# Altium PCB PCB robot V3.2.PCBDOC (part 2 of 3)
Units mil, origin at the board's own origin, x right, y up, seen from the top; angles counter-clockwise.
Board outline 11800 x 7870 mil, 2 copper layers (Top Layer, Bottom Layer); 128 components, 117 nets, 529 pads, 283 vias.
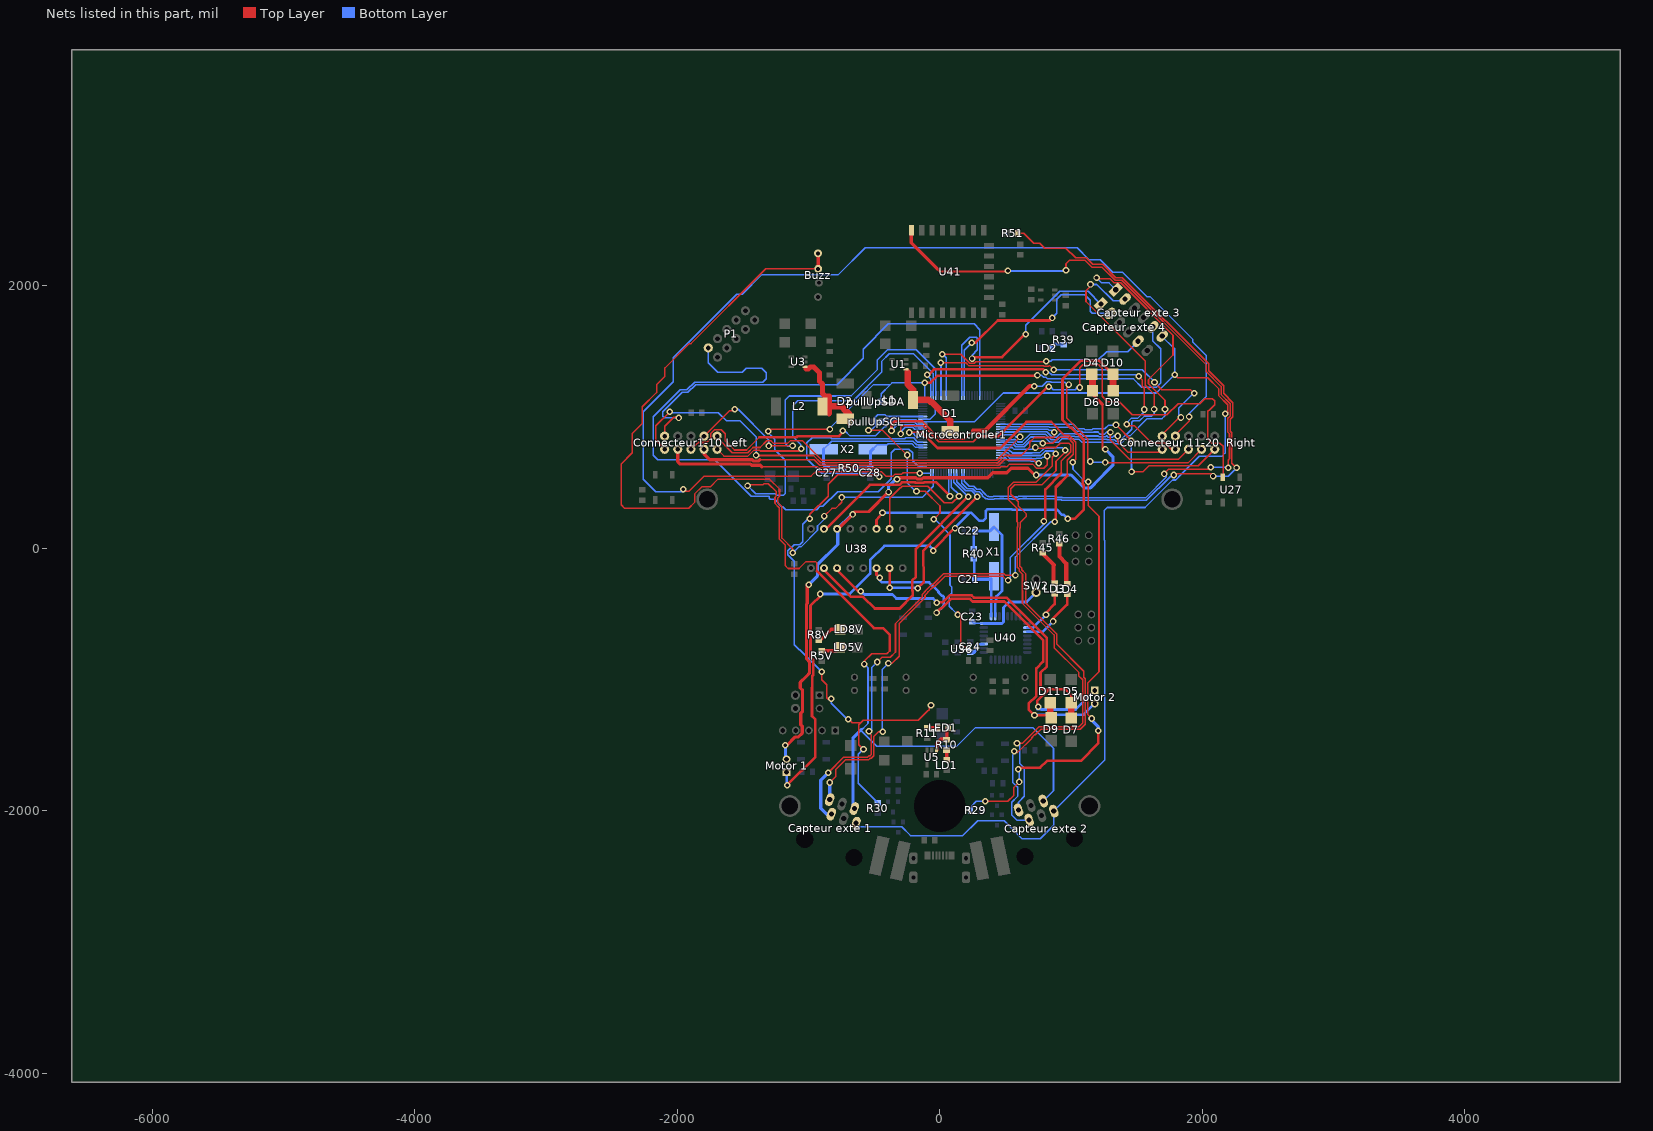
[diagram p2: the nets of this part, all layers, seen from the top]

## Via types
v1: diameter 50, hole 28, Top Layer to Bottom Layer, 283 vias

## Nets (pads, with @x,y where several pads share a name; then routed paths per layer and width w, separated by ;. In a path a pad name is that pad's centre, name@x,y a point inside that pad or via, vN(x,y) a via of type N, cw(c..) or ccw(c..) an arc to the next point about the centre after c; other vN are vias at no path point) (continued)
"MOTOR1 IN 1": MicroController1.18 U38.2 | length 1330.2
  Top Layer w20: U38.2@-881.89,148.62 -868.07,148.62 -532.56,484.13 -343.57,484.13 -342.92,483.48 -307.67,483.48 -288.75,502.4 -187.57,502.4 -183.58,498.41 -122.33,498.41 -118.33,502.4 -26.22,502.4 v1(78.54,397.64)
  Bottom Layer w10: MicroController1.18@69.1,569.75 69.1,407.08 v1(78.54,397.64)
"MOTOR1 IN 2": MicroController1.17 U38.7 | length 1070.6
  Top Layer w10: U38.7@-381.89,148.62 -381.89,380.57 -301.54,460.93 -298.32,460.93 -287.2,472.05 -89.7,472.05 35.07,347.27 96.88,347.27 v1(147.24,397.64)
  Bottom Layer w10: MicroController1.17@88.79,569.75 88.79,465.54 147.24,407.09 v1(147.24,397.64) v1@147.24,394.88
"MOTOR1 OUT+": "Motor 1.2" D4.1 D6.2 U38.3 | length 5289.2
  Top Layer w15: v1@1239.92,754.21 1239.92,1097.11
  Top Layer w20: v1@-650.69,279.82 -540.32,279.82
  Top Layer w23.82: v1@-1161.28,-1498.86 -1099.57,-1437.15 -1076.4,-1437.15 -1047.7,-1408.44 -1047.7,-1355.1 -1058.66,-1344.13 -1058.66,-1256.14 -1045.02,-1242.5 -1045.02,-1081.95 -1060.45,-1066.51 ; -1062.4,-1064.56 -1062.4,-1021.91 -1013.31,-972.82 -993.64,-953.15 -993.64,-863.49 -1013.82,-843.31 -1013.82,-423.68 -1009.55,-419.41 -1009.55,-277.97 v1(-998.33,-277.97) ; U38.3@-781.89,148.62 -771.85,148.62 v1(-662.22,258.25) ; -540.32,279.82 v1@-394.9,425.24 ; v1(-325.3,526.04) -313.21,538.13 -181.63,538.13 -171.37,527.87 -134.53,527.87 -124.28,538.13 367.2,538.13 404.61,575.53 510.58,575.53 545.11,610.06 673.5,610.06 v1@726.57,556.99 ; D6.2@1164.57,1201.57 1164.57,1172.46 1239.92,1097.11
  Top Layer w50: D4.1@1160.24,1325.98 1164.57,1321.65 D6.2@1164.57,1201.57
  Bottom Layer w23.82: v1(-1175.81,-1499.82) -1175.81,-1598.21 -1167.32,-1606.69 ; v1(-998.33,-277.97) -932.48,-212.13 -932.48,-126.2 -776.87,29.41 U38.3@-776.87,143.6 ; U38.3@-781.89,148.62 -672.26,258.25 v1(-662.22,258.25) ; v1(-389.67,428.64) -389.67,473.25 v1@-339.45,523.46 ; v1(734.72,558.6) 1001.99,558.6 1099.76,460.83 1150.61,460.83 1177.74,487.95 1177.74,489.94 1319.74,631.95 1319.74,698.74 v1@1269.21,749.27
  other v1: 1263.29,754.67
"MOTOR1 OUT-": "Motor 1.1" D8.2 D10.1 U38.6 | length 6669.7
  Top Layer w20: v1(-1162.24,-1805.18) -949.61,-1592.54 -949.61,-1302.55 -973.21,-1278.95 -973.21,-1062.23 -971.63,-1060.66 -971.63,-972.82 -964.17,-965.36 -964.17,-851.28 -984.35,-831.11 -984.35,-435.89 v1@-902.44,-353.98 ; U38.6@-481.89,148.62 -481.89,215.51 v1(-435.96,271.54) ; v1@-49.02,-8.25 v1@110.55,151.32 ; v1(976.3,225.1) 1028.88,225.1 1098.68,294.9 1098.68,480.82 1090.79,488.71 1090.79,523.97 1098.68,531.86 1098.68,707.59 1098.58,707.69 1098.58,753.75 1098.68,753.85 1098.68,824.18 1004.95,917.91 996.2,917.91 936.02,978.09 936.02,1288.86 1077.48,1430.31 1215.75,1430.31 D10.1@1320.67,1325.39
  Top Layer w50: D10.1@1320.67,1325.39 1320.67,1202.95 D8.2@1322.05,1201.57
  Bottom Layer w20: -1167.32,-1706.69 -1164.19,-1709.82 v1@-1164.19,-1789.67 ; v1(-909.23,-348.17) -685.51,-348.17 -529.37,-192.03 -529.37,-88.68 -421.73,18.96 -76.22,18.96 v1@-49.02,-8.25 ; v1(-435.96,271.54) 230.77,271.54 ; v1@110.55,151.32 230.77,271.54 ; v1(976.3,225.1) 946.5,254.9 933.94,254.9 894.7,294.13 552.32,294.13 548.44,298.01 364.31,298.01 352.4,286.1 352.4,231.06 332.34,211 300.94,211 240.41,271.54 230.77,271.54
  other v1: -49.92,-18.21 116.91,152.22
"MOTOR2 IN1": MicroController1.16 U38.10 | length 2006
  Top Layer w20: U38.10@-881.89,-151.38 -881.89,-165.94 -677.64,-370.2 -583.43,-370.2 -494.83,-458.8 -304.41,-458.8 -205.59,-359.98 -205.59,-325.03 -209.88,-320.74 -209.88,-245.19 -181.87,-217.18 -181.87,-4.7 v1(216.54,393.7)
  Bottom Layer w10: MicroController1.16@108.47,569.75 108.47,501.76 v1(216.54,393.7)
"MOTOR2 IN2": MicroController1.15 U38.15 | length 1522.5
  Top Layer w20: U38.15@-381.89,-151.38 U38.15@-381.89,-151.57 ; v1(-381.3,-299.67) -381.3,-235.63 -381.89,-236.22 U38.15@-381.89,-151.57 ; U38.15@-379.92,-149.61 U38.15@-381.89,-151.57 ; v1(-167.32,-303.11) -122.88,-258.62 -124.02,-17.72 v1(287.4,393.7)
  Bottom Layer w10: MicroController1.15@128.16,569.75 128.16,506.96 198.12,437.01 244.09,437.01 v1(287.4,393.7)
  Bottom Layer w20: v1(-381.3,-299.67) -170.77,-299.67 v1(-167.32,-303.11)
"MOTOR2 OUT+": "Motor 2.1" D5.1 D7.2 U38.11 | length 3323.8
  Top Layer w20: U38.11@-781.89,-151.38 -781.89,-165.12 -619.37,-327.64 v1(-601.06,-327.64) ; v1@-6.89,-409.82 23.35,-409.82 75.4,-357.78 242.57,-357.78 260.58,-375.79 507.97,-375.79 815.94,-683.76 815.94,-899.07 768.29,-946.73 768.29,-1057.38 785.71,-1074.8 959.21,-1074.8 1001.57,-1117.17 D5.1@1001.57,-1177.36 ; v1@743.27,-1207.24 743.27,-1163.23 831.69,-1074.8
  Top Layer w50: D7.2@1001.57,-1290.35 D5.1@1001.57,-1177.36
  Bottom Layer w20: -581.42,-344.06 -573.39,-352.09 -361.24,-352.09 -331.05,-382.28 -50.1,-382.28 v1@-18.95,-413.43 ; v1@744.13,-1226.22 770,-1226.22 771.71,-1227.93 1036.44,-1227.93 1181.14,-1083.23
  other v1: 751.02,-1207.24 -21.24,-415.73
"MOTOR2 OUT-": "Motor 2.2" D9.2 D11.1 U38.14 | length 3150
  Top Layer w20: U38.14@-481.89,-151.38 -481.89,-200.75 v1(-457.66,-224.98) ; v1(-24.04,-490.67) 10.85,-455.79 16.36,-455.79 86.81,-385.33 231.15,-385.33 250.6,-404.78 493.78,-404.78 788.39,-699.39 788.39,-863.84 737.22,-915 737.22,-1124.62 678.27,-1183.57 678.27,-1228.52 v1(722.56,-1272.81) 832.85,-1272.81 D9.2@844.09,-1284.06 ; D11.1@831.48,-1189.98 D11.1@844.09,-1177.36
  Top Layer w50: D9.2@844.09,-1284.06 D11.1@844.09,-1177.36
  Bottom Layer w20: v1@-464.72,-234.17 -441.71,-257.19 -363.7,-257.19 -362.09,-258.8 -79.65,-258.8 -8.92,-329.53 -8.92,-336.59 15.97,-361.48 23.03,-361.48 30.03,-368.48 30.03,-438.48 28.15,-438.48 v1(-24.04,-490.67) ; v1@724.29,-1267.78 1096.59,-1267.78 1181.14,-1183.23
NetBuzz_0: Buzz.0 MicroController1.24 pad.0 | length 6147.1
  Top Layer w12: -2334.78,883.07 -2342.42,875.43 -2342.42,728.43 -2427.54,643.31 -2427.54,331.34 -2402.09,305.89 -1911.95,305.89 -1867.89,349.94 -1867.89,413.88 -1811.52,470.25 -1747.58,470.25 -1692.85,524.98 -1294.63,524.98 -1220.94,451.3 -1220.94,396.87 -1235.51,382.31 -1235.51,350.37 -1202.65,317.51 -1202.65,78.39 -1119.21,-5.05 v1(-1119.21,-34.53) ; -2334.78,883.09 -2267.05,950.83 -2267.05,1078.17 -2157.48,1187.74 -2157.48,1247.48 -2094.25,1310.71 -2094.25,1374.43 -1908.33,1560.35 -1894.96,1560.35 -1325.28,2130.04 pad.0@-925.79,2130.04 ; v1(-880.18,245.79) -821.59,304.37 -794.46,304.37 -747.09,351.75 v1(-747.09,387.91)
  Top Layer w25: pad.0@-925.79,2130.04 Buzz.0@-925.79,2245.96
  Bottom Layer w12: v1(-1119.21,-34.53) -1074.03,10.65 -1057.84,10.65 -931.5,137 -931.5,171.03 -863.14,239.38 -869.55,245.79 v1(-880.18,245.79) ; v1(-747.09,387.91) -133.5,387.91 -49.01,472.41 MicroController1.24@-49.01,569.75
NetC21_1: C21.1 R40.1 U40.1 X1.1 | length 569.1
  Bottom Layer w19.68: R40.1@259.66,-80.85 264.54,-85.72 C21.1@264.54,-235.55 ; U40.1@392.04,-517.51 X1.1@392.04,-233.51
  Bottom Layer w25: C21.1@264.54,-235.55 390,-235.55 X1.1@392.04,-233.51
NetC22_1: C22.1 R40.2 U40.2 X1.2 | length 1023
  Bottom Layer w19.68: R40.2@259.66,-0.85 259.66,127.45 C22.1@264.54,132.33
  Bottom Layer w20: X1.2@413.75,162.22 474.74,101.23 474.74,-323.55 431.55,-366.74 431.55,-392.31 423.54,-400.32 U40.2@423.54,-517.51
  Bottom Layer w25: C22.1@264.54,132.33 383.86,132.33 X1.2@413.75,162.22
NetC23_2: C23.2 SW2.1 U40.4 U40.32 | length 654.5
  Bottom Layer w12: C23.2@247.24,-559.93 259.94,-572.62 U40.32@336.92,-572.62
  Bottom Layer w20: U40.32@336.92,-572.62 473.83,-572.62 486.53,-559.93 U40.4@486.53,-517.51 486.53,-451.66 529.53,-408.66 662.4,-408.66 SW2.1@735.04,-336.02
NetC24_2: C24.2 U40.27 | length 146.5
  Bottom Layer w20: 276,-749.97 295.87,-730.1 U40.27@336.92,-730.1
  Bottom Layer w25: C24.2@232.87,-791.84 262.88,-791.84 276,-778.73 276,-749.97
NetC27_1: C27.1 MicroController1.34 R50.2 X2.2 | length 1075.3
  Bottom Layer w12: X2.2@-884.76,754.25 -823.07,815.94 ; -400.26,815.94 -319.42,815.94 -319.36,815.89 -202.72,815.89 -175.39,788.56 -130.01,788.56 MicroController1.34@-129.71,788.26
  Bottom Layer w12.01: -823.07,815.94 -400.26,815.94
  Bottom Layer w25: X2.2@-884.76,754.25 -884.76,637.12 C27.1@-862,614.35 -857,609.35 R50.2@-730.21,609.35
NetC28_1: C28.1 MicroController1.33 R50.1 X2.1 | length 681.6
  Bottom Layer w12: X2.1@-510.75,754.25 -476.2,788.8 -399.85,788.8 -392.18,796.46 -327.48,796.46 -327.43,796.41 -211.17,796.41 -183.84,769.08 -167.48,769.08 -167.27,768.87 -137.88,768.87 -137.78,768.78 -129.92,768.78 MicroController1.33@-129.71,768.57
  Bottom Layer w25: R50.1@-650.21,609.35 -532.69,609.35 C28.1@-527.69,614.35 -527.69,737.31 X2.1@-510.75,754.25
"NetCapteur exte 1_1": "Capteur exte 1.1" MicroController1.93 | length 4531.7
  Top Layer w12: v1(-838.17,-1784.69) -793.52,-1740.04 -793.52,-1686.63 -719.59,-1612.7 -542.06,-1612.7 -529.11,-1599.75 -521.95,-1599.75 -502.56,-1580.35 -502.56,-1433.52 -466.48,-1397.44 v1(-433.43,-1397.44) ; v1(-390.55,-876.59) -363.01,-876.59 -309.07,-822.66 -309.07,-573.4 -112.23,-376.55 -112.23,-357.87 -89.65,-335.29 -89.65,-332.68 -49.74,-292.78 -40.99,-292.78 37.77,-214.02 482.42,-214.02 v1@519.41,-251 ; v1(729.57,768.29) 735.68,762.17 800.38,762.17 806.5,768.29 885,768.29 918.33,801.61 985.08,801.61 998.7,787.99 998.7,736.24 971.98,709.51 969.94,709.51 925.83,665.39 925.83,571.24 ; v1(794.43,206.69) v1@804.59,216.85
  Top Layer w19.68: v1@804.59,216.85 804.59,450 925.83,571.24
  Bottom Layer w12: v1@-437.05,-1397.44 -437.05,-923.09 v1(-390.55,-876.59) ; MicroController1.93@464.77,768.57 552.14,768.57 566.93,753.78 715.06,753.78 v1(729.57,768.29) v1@729.57,786.55 ; v1@536.24,-238.88 536.24,-72.22 799.96,191.5 v1@799.96,199.88
  Bottom Layer w25: v1(-838.17,-1784.69) -838.17,-1915.06 -821.6,-1915.06
  other v1: 521.14,-244.51
"NetCapteur exte 1_2": "Capteur exte 1.2" MicroController1.92 | length 4832.4
  Top Layer w10: v1(784.41,800.73) 863.37,800.73 907.87,845.24 974.84,845.24 1019.04,801.04 1019.04,780.08 1018.8,779.84 1018.8,738.39 1019.04,738.15 1019.04,717.19 973.86,672.01 973.86,555.24
  Top Layer w12: v1(-849.25,-1709.41) -732.98,-1593.14 -550.16,-1593.14 -537.21,-1580.19 -530.05,-1580.19 -522.71,-1572.84 -522.71,-1419.38 v1@-537.42,-1404.67 ; v1(-474.88,-866.14) -439.21,-830.47 -377.28,-830.47 -336.99,-790.18 -336.99,-573.65 -131.79,-368.45 -131.79,-349.77 -109.2,-327.18 -109.2,-324.58 -57.85,-273.22 -49.1,-273.22 29.66,-194.46 490.52,-194.46 501.22,-205.16 v1(577.18,-205.16)
  Top Layer w19.68: v1@884.33,202.5 884.33,465.71
  Top Layer w21.65: 884.33,465.71 973.86,555.24
  Bottom Layer w10: MicroController1.92@464.77,788.26 564.17,788.26 580.17,772.26 643.49,772.26 687.74,816.51 772.13,816.51 v1@790.69,797.95
  Bottom Layer w12: v1(-538.62,-1395.04) v1@-536.2,-1397.46 ; v1@-528.54,-1400.59 -516.93,-1388.98 -516.93,-908.19 v1(-474.88,-866.14) ; v1@577.11,-206.91 577.11,-66.2 845.81,202.5 v1@886.79,202.5
  Bottom Layer w25: v1(-849.25,-1709.41) -906.69,-1766.85 -906.69,-1980.67 -861.36,-2026 -825.76,-2026
  other v1: 876.2,203.76
"NetCapteur exte 1_5": "Capteur exte 1.5" "Capteur exte 2.5" "Capteur exte 3.5" MicroController1.44 pullUpSDA.2 | length 10679.5
  Top Layer w12: v1@-1464.31,484.9 -1346.24,484.9 -1338.06,493.09 -1306.11,493.09 -1244.07,431.05 -1244.07,401.4 -1255.07,390.41 -1255.07,342.27 -1222.21,309.41 -1222.21,70.29 -1175.81,23.89 -1175.81,-133.17 -1155.28,-153.7 -1071.73,-153.7 -1019.21,-101.18 -946.2,-101.18 -935.53,-111.85 -935.53,-173.52 ; v1@-1311.18,895.53 -1298.56,908.15 v1(-836.54,908.15) ; v1(-574.09,-882.07) -574.09,-859.25 -517.95,-803.11 -403.13,-803.11 -379.61,-779.59 ; v1@726.06,1315.08 v1@739.63,1328.64
  Top Layer w19.68: -935.53,-173.52 -500.65,-608.41 -430.89,-608.41 -379.61,-659.68 -379.61,-779.59 ; v1(-112.89,1262.97) -69.94,1262.97 -17.64,1315.28 612.9,1315.28 613.09,1315.08 v1@726.06,1315.08
  Bottom Layer w12: v1(-1464.33,477.95) -1402.43,416.05 -1306.15,416.05 -1305.92,416.28 -1255.07,416.28 -1243.62,404.82 -1189.57,404.82 -1176.95,417.44 -1176.95,670.98 -1257.6,751.63 -1257.6,831.52 -1324.21,898.13 -1324.21,899.45 -1317.3,892.54 v1(-1307.05,892.54) ; v1@-836.54,916.54 -507.64,1245.43 -378.58,1245.43 ; -609.55,-1397.44 -546.48,-1334.37 -546.48,-909.68 v1(-574.09,-882.07) ; -598.13,-1380.77 -598.13,-1390.59 -480.45,-1508.27 119.16,-1508.27 124.69,-1513.8 269.82,-1368.67 712.58,-1368.67 867.09,-1523.17 867.09,-1847.37 788.78,-1925.68 ; pullUpSDA.2@-446.24,1118.27 -446.24,1177.78 -378.58,1245.43 ; MicroController1.44@-129.71,985.11 -72.23,985.11 -34.27,1023.07 -34.27,1069.61 -112.89,1148.23 v1(-112.89,1262.97) -115.35,1260.51 -363.5,1260.51 -378.58,1245.43 ; v1(744.78,1319.61) 776.8,1319.61 792.25,1304.16 810.53,1304.16 823.44,1291.24 1477.09,1291.24 1540.35,1227.98 1653.1,1227.98 1684.41,1259.28 1684.41,1520.57 1624,1580.98 1624,1685.8
  Bottom Layer w25: -650.23,-1983.47 -660.12,-1973.58 -660.12,-1442.76 -598.13,-1380.77
"NetCapteur exte 1_6": "Capteur exte 1.6" "Capteur exte 2.6" "Capteur exte 3.6" MicroController1.43 pullUpSCL.2 | length 8986.2
  Top Layer w12: v1(1790.94,1324.07) 1814.84,1300.18 2042.22,1300.18 2125.23,1217.16 2125.23,1164.85 2195.53,1094.55 v1@2195.53,1026.69
  Bottom Layer w12: -637.82,-2094.4 -609.82,-2122.4 -289.76,-2122.4 -222.92,-2189.25 175.73,-2189.25 289.44,-2075.54 290.14,-2076.24 491.16,-2076.24 627.83,-2212.91 766.28,-2212.91 869.59,-2109.6 869.59,-2002.68 1258.87,-1613.4 1258.87,59.1 1255.43,62.55 1255.43,289.21 1277.18,310.96 1565.33,310.96 1774.94,520.57 1799.4,520.57 1821.94,543.12 1821.94,546.33 1977.24,701.63 2150.87,701.63 2175.22,725.98 v1(2175.22,1024.61) ; pullUpSCL.2@-445.26,965.59 -429.74,981.1 -182.65,981.1 -167.18,965.63 -129.92,965.63 MicroController1.43@-129.71,965.42 265.9,965.42 483.99,1183.52 1650.39,1183.52 v1(1790.94,1324.07) 1790.94,1524.53 1785.28,1524.53 1694.71,1615.09
"NetCapteur exte 2_1": "Capteur exte 2.1" MicroController1.95 | length 4079.8
  Top Layer w12: v1(589.17,-1485.89) 631.73,-1485.89 681.21,-1436.41 681.21,-1436.1 758.66,-1358.66 1063.04,-1358.66 1090.43,-1331.26 1090.43,-1002.14 1058.64,-970.34 1058.64,-943.33 872.06,-756.76 872.06,-660.52 631.24,-419.69 631.24,-198.42 605.47,-172.66 605.47,-158.16 591.51,-144.19 591.51,162.49 593.93,164.91 593.93,196.86 588.95,201.84 588.95,305.52 521.32,373.15 521.32,462.56 563.6,504.84 735.5,504.84 858.72,628.06 858.72,694.5 v1(885.28,721.06)
  Bottom Layer w12: MicroController1.95@464.77,729.2 498.28,729.2 498.48,729 517.97,729 539.79,707.17 730.2,707.17 730.36,707.33 769.58,707.33 804.22,741.96 870.83,741.96 ; v1@598.74,-1488.7 611.02,-1500.98 611.02,-1640.11 645.39,-1674.47 645.39,-1890.08 600.84,-1934.64 600.84,-1994.09
"NetCapteur exte 2_2": "Capteur exte 2.2" MicroController1.94 | length 4446.4
  Top Layer w12: v1@587.2,-1556.81 592.66,-1556.81 700.77,-1448.7 700.77,-1444.21 723.36,-1421.62 727.85,-1421.62 771.25,-1378.22 1071.7,-1378.22 1109.99,-1339.93 1109.99,-994.04 1097.7,-981.74 1097.7,-935.96 891.62,-729.89 891.62,-652.42 654.48,-415.28 654.48,-192.18 625.03,-162.73 625.03,-150.05 611.07,-136.09 611.07,154.39 613.49,156.81 613.49,196.56 661.22,244.29 661.22,260.91 598.68,323.45 598.68,354.98 540.88,412.78 540.88,454.46 571.7,485.28 780.33,485.28 886.52,591.48 886.52,663.33 v1@964.25,741.06
  Bottom Layer w10: MicroController1.94@464.77,748.89 530.29,748.89 552.52,726.65
  Bottom Layer w12: 551.87,726.65 552.52,726.65 703.44,726.65 ; 555.77,-1710.98 555.77,-1783.77 591.07,-1819.07 593.41,-1819.07 593.41,-1891.04 549.02,-1935.43 549.02,-2033.12 586.98,-2071.09 681.65,-2071.09 ; 556.54,-1718.17 556.54,-1572.88 ; 703.44,726.81 761.52,726.81 796.15,761.44 866.16,761.44 870.03,765.31 938.76,765.31 v1(956,748.07)
  other v1: 567.26,-1545.96
"NetCapteur exte 3_1": "Capteur exte 3.1" MicroController1.91 | length 3092.2
  Top Layer w12: v1@1206.22,2055.94 1296.07,2055.94 1328.9,2023.12 1379.33,2023.12 1777.85,1624.6 1777.85,1472.68 1591.1,1285.93 1591.1,1254.76 1716.95,1128.92 v1(1716.95,1060.3)
  Bottom Layer w12: MicroController1.91@464.77,807.94 570.62,807.94 587.82,790.74 635.84,790.74 693.74,848.64 800.66,848.64 841.35,807.95 905.5,807.95 932.54,834.99 1019.43,834.99 1022.06,832.36 1060.11,832.36 1084.87,807.6 1323.51,807.6 1333.01,798.1 1381.02,798.1 1439.81,856.89 1450,856.89 1582.03,988.92 1695.16,988.92 1716.95,1010.71 v1(1716.95,1060.3) ; v1(1195.59,2061.22) 1234.19,2022.62 1290.39,2022.62 1342.08,1970.93
"NetCapteur exte 3_2": "Capteur exte 3.2" MicroController1.90 | length 2910.3
  Top Layer w12: v1@1168.21,2015.89 1114.78,1962.46 1114.78,1880.77 1567.2,1428.35 1567.2,1242.2 1633.6,1175.81 v1(1633.6,1060.59)
  Bottom Layer w12: MicroController1.90@464.77,827.63 562.76,827.63 564.35,829.22 576.89,829.22 595.89,810.22 627.77,810.22 685.67,868.12 808.73,868.12 849.42,827.43 897.43,827.43 924.47,854.47 1027.5,854.47 1030.13,851.84 1068.18,851.84 1089.82,830.2 1272.31,830.2 1273.15,831.04 1277.11,827.08 1331.58,827.08 1341.08,817.58 1372.95,817.58 1463.62,908.25 1463.62,960.88 1474.31,971.57 1523.39,971.57 1560.43,1008.62 1616,1008.62 1633.6,1026.22 v1(1633.6,1060.59) ; v1(1149.35,2010.94) 1197.83,2010.94 1322.64,1886.14 1398.71,1886.14 1412.79,1900.22
"NetCapteur exte 4_1": "Capteur exte 4.1" MicroController1.63 | length 1987.8
  Top Layer w10: v1(246.46,1446.32) v1@256.79,1456.65
  Top Layer w19.68: v1@256.79,1456.65 475.75,1456.65 v1@658.72,1639.63
  Bottom Layer w10: MicroController1.63@167.53,1164.24 167.53,1548.53 229.41,1610.41 279.58,1610.41 287.73,1602.26 287.73,1512.04 246.46,1470.77 v1(246.46,1446.32) ; v1(656.28,1631.08) 656.28,1699.37 916.08,1959.17 1130.98,1959.17 1228.79,1861.36
"NetCapteur exte 4_2": "Capteur exte 4.2" MicroController1.64 | length 1804.7
  Top Layer w10: v1(245.28,1567.22) 273.33,1567.22 ; 838.05,1736.42 v1(857.28,1755.65)
  Top Layer w19.68: 273.33,1567.22 442.52,1736.42 838.05,1736.42
  Bottom Layer w10: MicroController1.64@187.21,1164.24 187.21,1509.16 v1(245.28,1567.22) ; v1(857.28,1755.65) 892.29,1790.65 892.29,1899.37 926.75,1933.84 1104.25,1933.84 1146.91,1891.18 1146.91,1808.19 1164.45,1790.65 1299.5,1790.65
"NetCapteur exte 4_5": "Capteur exte 4.5" MicroController1.57 | length 1938.6
  Top Layer w10: v1(19.21,1479.47) 160.14,1479.47 230.88,1408.72 262.03,1408.72 273.55,1420.24 v1@830.02,1420.24
  Bottom Layer w10: v1@19.92,1482.28 49.42,1452.79 MicroController1.57@49.42,1164.24 ; v1(811.73,1425.14) 844.92,1425.14 855.96,1436.18 1209.11,1436.18 1271.3,1498.37 1431.48,1498.37 1511.64,1578.52
"NetConnecteur1-10 Left_1": "Connecteur1-10 Left.1" MicroController1.52 | length 2562.5
  Top Layer w12: -1696.06,755.12 -1643.74,702.8 -1461.42,702.8 -1415.64,748.58 -1375.87,748.58 -1369.12,741.83 -1070.17,741.83 v1(-1053.96,758.05)
  Bottom Layer w12: v1(-1053.96,758.05) -1057.72,761.81 -1057.72,789.33 -1120.26,851.87 -1120.26,1085.39 -1080.83,1124.82 -658.84,1124.82 -442.7,1340.96 -442.7,1424.61 -384.23,1483.07 -199.86,1483.07 -49.01,1332.21 MicroController1.52@-49.01,1164.24
"NetConnecteur1-10 Left_2": "Connecteur1-10 Left.2" MicroController1.88 | length 2714.2
  Top Layer w12: -1701.79,855.12 -1696.06,855.12 -1696.06,844.69 -1580.3,728.92 -1462.96,728.92 -1423.74,768.14 -1369.25,768.14 -1318.39,818.99 -1286.45,818.99 -1269.79,802.33 -1156.43,802.33 -1137.43,821.33 -1105.49,821.33 -1103.23,819.08 -1045.22,819.08 -897.6,671.46 434.59,671.46 v1(611.83,848.7)
  Bottom Layer w12: MicroController1.88@464.77,867 562.47,867 580.77,848.7 v1(611.83,848.7)
"NetConnecteur1-10 Left_3": "Connecteur1-10 Left.3" MicroController1.97 | length 3020.1
  Top Layer w12: -1371.51,674.45 -955.91,674.45 -913.8,632.34 450.79,632.34 492.9,674.45 545.22,674.45 ; 501.89,674.23 715.71,674.23 740.57,649.37 v1(754.37,649.37)
  Top Layer w25: -1796.06,755.12 -1796.06,717.46 -1753.05,674.45 -1427.82,674.45 -1418.33,664.96 -1381,664.96 -1371.51,674.45
  Bottom Layer w12: MicroController1.97@464.77,689.83 502.03,689.83 525.43,666.44 694,666.44 697.92,662.51 744.4,662.51 v1@763.39,643.52
"NetConnecteur1-10 Left_4": "Connecteur1-10 Left.4" MicroController1.53 | length 2900.7
  Top Layer w12: -1796.06,855.12 -1602.5,1048.68 -1574.04,1048.68 v1(-1562.66,1060.06) ; v1@-1302.42,782.78 v1(-1121.46,782.78)
  Bottom Layer w12: v1(-1562.66,1060.06) -1536.1,1060.06 -1302.42,826.38 v1(-1302.42,780.43) ; v1@-1131.56,778.11 -1157.19,778.11 -1175.83,796.75 -1175.83,1132.26 -1147.19,1160.9 -675.65,1160.9 -474.39,1362.16 -474.39,1437.61 -397.91,1514.09 -179.17,1514.09 -29.32,1364.24 MicroController1.53@-29.32,1164.24
"NetConnecteur1-10 Left_5": "Connecteur1-10 Left.5" MicroController1.42 | length 2080.5
  Top Layer w12: -1896.06,755.12 -1890.67,755.12 -1839.23,806.56 -1775.95,806.56 -1744.62,837.89 -1744.62,875.23 -1716.18,903.68 -1664.8,903.68 -1634.51,873.39 -1634.51,819.7 -1563.98,749.17 -1471.91,749.17 -1373.39,847.7 ; v1@-739.9,882.17 v1(-739.9,895.93)
  Top Layer w19.68: -1373.39,847.7 -1090.58,847.7 -1082.71,855.57 -766.5,855.57 v1@-739.9,882.17
  Bottom Layer w12: v1(-739.9,895.93) -723.82,895.93 -684.45,856.56 -490.33,856.56 -419.78,927.11 -411.78,927.11 -377.26,961.62 -190.72,961.62 -174.84,945.74 MicroController1.42@-129.71,945.74
"NetConnecteur1-10 Left_7": "Connecteur1-10 Left.7" MicroController1.96 | length 3406.5
  Top Layer w12: -1355.57,620.45 -929.58,620.45 -921.9,612.78 458.89,612.78 466.56,620.45 510.3,620.45 531.73,641.89 707.32,641.89 738.4,610.81 793.27,610.81 820.16,637.7 v1(820.16,703.48)
  Top Layer w25: -1996.06,755.12 -1996.06,661 -1976.95,641.89 -1441.3,641.89 -1431.82,632.4 -1367.52,632.4 -1355.57,620.45
  Bottom Layer w12: MicroController1.96@466.31,709.52 509.9,709.52 531.72,687.69 700.29,687.69 705.99,681.99 732.57,681.99 738.43,687.85 770.31,687.85 770.47,687.69 777.5,687.69 785.12,695.32 811.99,695.32 v1(820.16,703.48)
"NetConnecteur1-10 Left_9": "Connecteur1-10 Left.9" MicroController1.86 | length 4078.5
  Top Layer w12: -2096.06,755.12 -2164.23,823.29 -2164.23,933.41 v1(-2056.18,1041.46) ; v1@-1392.4,707.3 -961.11,707.3 -905.7,651.9 442.69,651.9 498.09,707.3 620.73,707.3 685.85,772.42 685.85,807.68 722.86,844.69 865.51,844.69 873.43,852.6 v1(873.43,885.39)
  Bottom Layer w12: v1@-2058.92,1034.19 -1686.75,1034.19 -1623.33,970.77 -1519.81,970.77 -1399.67,850.63 v1(-1399.67,710.02) ; MicroController1.86@464.77,906.37 587.53,906.37 587.82,906.66 669.11,906.66 669.53,907.08 824.87,907.08 833.42,898.53 860.29,898.53 v1(873.43,885.39)
"NetConnecteur1-10 Left_10": "Connecteur1-10 Left.10" MicroController1.70 | length 3641
  Top Layer w10: -2096.06,855.12 -2096.06,929.04 -2026.54,998.56 v1@-1996.18,998.56
  Bottom Layer w10: -2111.32,870.37 -2096.06,855.12 ; v1(-1989.21,993.64) -2096.65,993.64 -2111.32,1008.31 -2111.32,1039.49 -1961.68,1189.13 -1919.05,1189.13 -1860.23,1247.95 -781.73,1247.95 -582.07,1447.62 -582.07,1518.94 -390.26,1710.75 261.73,1710.75 305.32,1667.16 MicroController1.70@305.32,1164.24
"NetConnecteur 11-20  Right_1": "Connecteur 11-20  Right.1" MicroController1.84 | length 1983.7
  Top Layer w12: v1@1356.36,928.58 v1@1456.91,828.03 ; v1(1462.05,583.21) 1549.98,583.21 1595.61,628.84 1969.78,628.84 2096.06,755.12
  Bottom Layer w12: MicroController1.84@464.77,945.74 653.09,945.74 653.4,946.04 841,946.04 841.31,945.74 1021.56,945.74 1021.56,943.06 1054.34,910.28 1100.7,910.28 1105.96,905.02 1163.44,905.02 1169.54,911.12 1257.87,911.12 1285.69,938.94 v1@1332.09,938.94 ; v1(1459.51,818.41) 1459.51,645.53 1462.05,642.99 v1(1462.05,583.21)
  other v1: 1343.5,940.43
"NetConnecteur 11-20  Right_3": "Connecteur 11-20  Right.3" MicroController1.41 | length 3451.5
  Top Layer w12: -133.24,968.03 2.31,832.48 190.49,832.48 254.02,896 ; v1(984.41,1248.11) 967.28,1230.98 967.28,1158.05 966.77,1157.54 966.77,995.02 1128.44,833.35 1128.44,680.75 v1(1147.54,661.65) ; v1@1276.18,651.1 1892.05,651.1 1996.06,755.12
  Top Layer w19.68: v1(-367.28,896.52) -367.28,944.35 -343.61,968.03 -133.24,968.03
  Top Layer w31.5: 254.02,896 346.14,896 685.94,1235.81 v1(721.81,1235.81)
  Bottom Layer w12: v1(-367.28,896.52) -322.72,941.08 -197.73,941.08 -182.91,926.26 -129.92,926.26 MicroController1.41@-129.71,926.05 ; v1(721.81,1235.81) 782.02,1235.81 815.69,1269.48 847.57,1269.48 850.4,1266.65 952.87,1266.65 v1@970.91,1248.62 ; v1(1147.54,661.65) 1154.74,654.45 v1(1260.61,654.45)
"NetConnecteur 11-20  Right_5": "Connecteur 11-20  Right.5" MicroController1.85 | length 1606.5
  Top Layer w12: v1(1301.12,885.04) 1301.12,824.63 1446.08,679.67 1820.61,679.67 1896.06,755.12
  Bottom Layer w12: MicroController1.85@464.77,926.05 464.86,926.14 661.04,926.14 661.46,926.56 832.94,926.56 835.62,923.87 1013.2,923.87 1046.27,890.8 1084.32,890.8 1089.57,885.54 1171.51,885.54 1172.6,886.63 1206.82,886.63 1223.98,869.47 1256.49,869.47 1273.65,886.63 v1@1292.8,886.63
"NetConnecteur 11-20  Right_7": "Connecteur 11-20  Right.7" MicroController1.51 | length 2744.7
  Top Layer w12: 787.42,1363.41 v1(808.19,1342.64) ; v1@1419.04,932.64 1485.83,932.64 1614.75,803.72 1716.19,803.72 1764.79,755.12 1796.06,755.12 ; v1(1517.48,1310.3) 1542.52,1285.26 1542.52,1235.33 1548.78,1229.07 ; 1542.78,1235.94 1558.33,1220.39 v1(1558.33,1058.21)
  Top Layer w19.68: v1@-78.47,1328.65 -43.72,1363.41 787.42,1363.41
  Bottom Layer w12: v1@-108.76,1310.31 -85.67,1310.31 -68.69,1293.34 MicroController1.51@-68.69,1164.24 ; v1(808.19,1342.64) 833.09,1342.64 853.28,1322.44 v1@1518.62,1322.44 ; v1(1425.14,944.94) 1415,944.94 1462.54,992.48 1510.91,992.48 1558.33,1039.9 v1(1558.33,1058.21)
  other v1: -94.41,1322.54
"NetConnecteur 11-20  Right_8": "Connecteur 11-20  Right.8" MicroController1.25 | length 8786.7
  Top Layer w12: v1@-1938.78,435.45 -1910.16,435.45 -1795.1,550.51 -979.9,550.51 -948.29,582.12 -916.35,582.12 -913.52,584.96 -444.78,584.96 -410.33,550.51 -355.36,550.51 -341.27,564.6 -309.32,564.6 -308.32,563.6 -290.32,563.6 -278.52,575.39 -156,575.39 v1(-152.95,572.34) ; 1796.06,855.12 1796.06,863.9 1900.69,968.52 v1(1900.69,1001.85)
  Bottom Layer w12: v1@-1951.06,431.75 -2164.09,431.75 -2258.64,526.3 -2258.64,1041.5 -2031.56,1268.58 -2031.56,1452.11 -1547.45,1936.22 -1504.77,1936.22 -1354.84,2086.14 -771.67,2086.14 -566.93,2290.89 1047.93,2290.89 1138.7,2200.12 1224.17,2200.12 1319.39,2104.9 1392.46,2104.9 1581.2,1916.16 1606.28,1916.16 1930.17,1592.26 1930.17,1570.44 2030.87,1469.74 2030.87,1157.83 v1@1889.96,1016.93 ; v1(-152.95,572.34) MicroController1.25@-71.28,572.34
  other v1: -1953.48,450.16
"NetConnecteur 11-20  Right_9": "Connecteur 11-20  Right.9" MicroController1.87 | length 1377.9
  Top Layer w12: v1@1349.61,848.67 v1(1357.01,856.06) 1357.01,809.76 1433.56,733.21 1674.15,733.21 1696.06,755.12
  Bottom Layer w12: MicroController1.87@464.77,886.68 595.39,886.68 595.89,887.18 677.18,887.18 677.6,887.6 816.8,887.6 857.49,846.91 889.36,846.91 916.4,873.95 1035.57,873.95 1038.2,871.32 1076.25,871.32 1091.51,856.06 1209.84,856.06 1216.23,849.68 1264.24,849.68 1270.63,856.06 1275.68,856.06 1285.18,846.56 1317.06,846.56 1326.57,856.06 v1(1357.01,856.06)
"NetConnecteur 11-20  Right_10": "Connecteur 11-20  Right.10" MicroController1.55 | length 2759.1
  Top Layer w12: v1(8.19,1415.12) 198.18,1415.12 223.18,1390.12 792.22,1390.12 795.76,1386.58 827.7,1386.58 831.25,1390.12 840.19,1390.12 v1(869.27,1361.04) ; v1(1637.17,1266.46) 1637.17,1262.91 1691.46,1208.62 1912.11,1208.62 v1(1939.55,1181.18) v1@1933.78,1181.18 ; 1696.06,855.12 1696.06,868.23 1823.03,995.2 1823.03,1009.25 1835.26,997.03 v1(1838.48,997.03)
  Bottom Layer w12: v1@7.34,1408.27 10.05,1405.56 MicroController1.55@10.05,1164.24 ; v1(869.27,1361.04) 1543.96,1361.04 v1@1640.13,1264.87 ; v1(1838.48,997.03) 1835.26,997.03 1823.03,1009.25 1823.03,1070.43 1933.78,1181.18 v1(1939.55,1181.18)
NetD1_2: D1.2 L1.2 U1.1 | length 656.2
  Top Layer w50: -243.64,1342.89 -243.64,1249.19 -202.85,1208.41 L1.2@-202.85,1130.98 -85.67,1130.98 -72.01,1117.32 -62.91,1117.32 79,975.41 D1.2@79,894.27
NetD2_2: D2.2 L2.2 U3.1 | length 729.1
  Top Layer w39.37: -1016.87,1368.68 -999.35,1368.68 -985.49,1382.54 -959.47,1382.54 -915.3,1338.37 -915.3,1273.01 -893.64,1251.36 -893.64,1180.57 -873.31,1160.24 -841.67,1160.24 -841.67,1081.87 -841.67,1027.62 -844.59,1024.7
  Top Layer w50: -841.67,1081.87 -749.21,1081.87 -730.69,1063.35 -730.69,1062.37 -688.13,1019.81 D2.2@-688.13,960.02
NetLD1_K: LD1.K R10.1 | length 70.9
  Top Layer w25: LD1.K@54.13,-1611.75 R10.1@54.13,-1540.88
NetLD2_K: LD2.K R39.1 | length 86.9
  Bottom Layer w25: LD2.K@856.73,1537.52 876.41,1557.21 R39.1@935.47,1557.21
NetLD3_A: LD3.A R45.1 | length 235.7
  Top Layer w31.5: R45.1@786.57,-43.27 870.12,-126.81 ; 868.6,-245.93 868.6,-128.33
NetLD3_K: LD3.K U40.10 | length 385.6
  Top Layer w20: v1(810.3,-506.48) 810.3,-491.44 876.2,-425.53 LD3.K@876.2,-346.37
  Bottom Layer w10: v1@810.3,-521.54 v1(810.3,-506.48)
  Bottom Layer w20: U40.10@667.63,-604.12 712.65,-604.12 v1(810.3,-506.48)
NetLD4_A: LD4.A R46.1 | length 328.1
  Top Layer w12: LD4.A@964.09,-263.67 LD4.A@970.83,-270.4
  Top Layer w31.5: R46.1@912.22,33.39 912.22,-63.31 964.09,-115.18 LD4.A@964.09,-263.67
NetLD4_K: LD4.K U40.11 | length 479.9
  Top Layer w20: v1(863.92,-557.28) 863.92,-535.65 970.83,-428.74 LD4.K@970.83,-350.4
  Bottom Layer w20: U40.11@667.63,-635.62 785.58,-635.62 v1(863.92,-557.28)
NetLD5V_A: LD5V.A R5V.1 | length 147.8
  Top Layer w25: R5V.1@-900.35,-779.74 -789.07,-779.74 LD5V.A@-763.27,-753.94
NetLD8V_A: LD8V.A R8V.1 | length 197.5
  Top Layer w25: R8V.1@-921.54,-700.43 -911.73,-700.43 -827.11,-615.81 LD8V.A@-759.07,-615.81
NetLED1_A: LED1.A R10.2 U5.1 | length 234.8
  Top Layer w25: U5.1@-23.2,-1537.91 -23.2,-1484.22 6.51,-1454.51 56.07,-1454.51 56.34,-1454.24 LED1.A@56.34,-1365.08
NetLED1_K: LED1.K R11.1 | length 77.5
  Top Layer w25: R11.1@-94.26,-1368.13 LED1.K@-16.74,-1368.13
NetMicroController1_12: MicroController1.12 U41.22 | length 5947.4
  Top Layer w12: v1(962.6,2120.08) 962.6,2168.78 987.94,2194.12 1109.1,2194.12 1160.54,2142.68 1237,2142.68 1337,2042.68 1387.44,2042.68 2032.64,1397.47 2032.64,1345.26 2144.79,1233.11 2144.79,1172.95 2215.09,1102.65 2215.09,1018.59 2213.78,1017.28 2213.78,1008.63 2196.29,991.15 2196.29,886.16 2208.96,873.49 2208.96,682.03 2198.72,671.79 v1(2198.72,613.58) ; v1(1712.6,566.93) 1712.6,570.87 1744.09,602.36 v1@2057.09,602.36
  Top Layer w16.06: 2.4,2109.8 v1@514.21,2109.8
  Top Layer w20: -19.3,2131.51 2.4,2109.8 ; v1@514.21,2109.8 v1(520.35,2115.94)
  Top Layer w25: U41.22@-215.87,2430.73 -215.87,2328.07 -19.3,2131.51
  Bottom Layer w12: MicroController1.12@187.21,569.75 187.21,511.6 225.61,473.2 259.09,473.2 282.39,449.9 310.34,449.9 343.36,416.88 343.36,416.01 364.1,395.27 373.95,395.27 375.03,394.2 406.9,394.2 407.98,395.27 457.26,395.27 457.58,394.94 489.46,394.94 489.79,395.27 558.5,395.27 562.36,391.41 587.13,391.41 587.83,390.71 594.94,390.71 599.49,395.27 631.43,395.27 631.66,395.04 663.54,395.04 663.77,395.27 888.39,395.27 896.13,387.54 933.39,387.54 936.79,384.13 1568.04,384.13 1725.39,541.49 v1@1725.39,577.76 ; v1(2066.02,618.66) v1@2189.94,618.66
  Bottom Layer w20: v1(520.35,2115.94) 952.76,2110.24 v1@956.69,2114.17
NetMicroController1_13: MicroController1.13 R51.1 | length 5076.1
  Top Layer w10: R51.1@595.24,2402.29 639.05,2402.29 715.33,2326 761.9,2326 800.01,2287.9 961.87,2287.9 1037.09,2212.68 1116.78,2212.68 1165.35,2164.11 1241.81,2164.11 1342.26,2063.66 1392.7,2063.66 2051.2,1405.16 2051.2,1352.95 2163.35,1240.8 2163.35,1180.64 2233.65,1110.34 2233.65,1010.9 2232.33,1009.59 2232.33,1000.95 2214.85,983.46 2214.85,893.85 2227.52,881.17 2227.52,648.7 v1(2262.42,613.8) ; v1(1783.46,559.06) 1793.31,568.9 v1@2078.74,568.9
  Bottom Layer w10: MicroController1.13@167.53,569.75 167.53,497.82 210.75,454.61 251.38,454.61 274.81,431.18 302.93,431.18 324.88,409.23 324.88,401.16 349.25,376.79 366.3,376.79 367.37,375.72 414.56,375.72 415.63,376.79 449.6,376.79 449.93,376.46 497.12,376.46 497.44,376.79 550.84,376.79 554.7,372.93 579.48,372.93 580.18,372.23 602.59,372.23 607.15,376.79 623.78,376.79 624,376.56 671.19,376.56 671.42,376.79 880.74,376.79 888.47,369.06 925.74,369.06 929.26,365.54 1575.57,365.54 1755.31,545.28 v1@1785.43,545.28 ; v1(2083.48,550.93) 2199.07,550.93 v1@2247.7,599.55
NetMicroController1_26: MicroController1.26 P1.2 | length 4582.5
  Bottom Layer w10: P1.2@-1778.88,1512.15 P1.2@-1763.62,1527.4 -1763.62,1413.29 -1691.08,1340.75 -1506.5,1340.75 -1473.25,1374 -1356.89,1374 -1322.17,1339.27 -1322.17,1292.38 -1349,1265.55 -1867.52,1265.55 -1926.34,1206.73 -1977.46,1206.73 -2182.68,1001.51 -2182.68,709.26 -2147.44,674.02 -1714.45,674.02 -1438,397.57 -1298.49,397.57 -1298.26,397.8 -1298.26,382.01 -1291.27,375.01 -1258.62,375.01 -1202.13,318.52 -1197.84,318.52 -1174.46,295.14 -936.7,295.14 -912.45,319.39 -891.52,319.39 -778.41,432.5 -467.83,432.5 -369.78,530.55 -369.78,729.25 -343.07,755.96 -234.55,755.96 -205.41,726.83 -205.41,668.98 -167.21,630.78 MicroController1.26@-129.71,630.78
NetMicroController1_35: MicroController1.35 R30.1 | length 5642.7
  Top Layer w10: v1(-989.53,225.18) -989.53,258.76 -850.22,398.07 -850.22,488.03 -778.05,560.2 v1@-456.52,560.2 ; v1(-900.08,-939.98) -900.08,-1000.55 -861.61,-1039.02 -861.61,-1139.59 v1@-845.94,-1155.26 ; v1(-696.16,-1302.8) -667.99,-1330.96 -602.48,-1330.96 ; v1(-580.83,-1532.46) -616.14,-1497.15 -616.14,-1344.63 -602.48,-1330.96 ; v1(-66.08,-1195.02) -80.91,-1209.84 -80.91,-1229.47 -93.31,-1241.87 -95.62,-1241.87 -163.81,-1310.06 -581.58,-1310.06 -602.48,-1330.96
  Bottom Layer w10: v1@-1007.11,220.67 -1044.65,183.13 -1044.65,83.24 -1043.54,82.14 -1043.54,51.09 -1065.5,29.13 -1108.56,29.13 -1156.69,-19 -1156.69,-50.05 -1109.35,-97.39 -1109.35,-736.44 -1072.03,-773.76 -1066.3,-773.76 v1(-900.08,-939.98) ; v1(-825.37,-1145.41) -825.37,-1181.2 v1@-695.73,-1310.85 ; v1@-574.06,-1523.07 -620.96,-1569.98 -620.96,-1791.1 R30.1@-472.09,-1939.98 ; v1@-456.69,539.29 -489.27,571.87 -899.11,571.87 -1011.3,684.06 -1011.3,804.76 -972.2,843.86 -829.65,843.86 -821.2,835.41 -312.75,835.41 -311.71,834.37 -280.66,834.37 -280.6,834.43 -268.27,834.43 -268.27,834.37 -267.33,834.37 -260.18,841.52 -199.13,841.52 -166.86,809.24 -144.25,809.24 -142.95,807.94 MicroController1.35@-129.71,807.94
  other v1: -460.75,546.4
NetMicroController1_37: MicroController1.37 R29.1 | length 5388.8
  Top Layer w10: v1(-231.18,882.93) -134.48,882.93 ; 848.51,963.43 949.14,862.8 982.12,862.8 1036.59,808.32 1036.59,678.15 v1(1014.53,656.08)
  Top Layer w12: v1(347.3,-1927.42) 519.37,-1927.42 565.43,-1881.37 565.43,-1821.97 v1(606.91,-1780.49) ; v1(599.68,-1683.19) v1@610.89,-1671.99 ; v1(1133.35,506.34) 1133.35,325.28 1214.25,244.37 1214.25,-940.06 1129.55,-1024.76 1129.55,-1268.17 v1(1158.17,-1296.79) v1@1143.44,-1296.79
  Top Layer w19.68: -134.48,882.93 -16.09,764.55 462.89,764.55 661.77,963.43 848.51,963.43 ; v1@610.89,-1671.99 765.87,-1671.99 818.5,-1619.35 1075.35,-1619.35 1207.97,-1486.73 v1(1207.97,-1389.63)
  Bottom Layer w10: v1@-231.18,874.55 v1(-231.18,882.93) -208.84,882.93 -173.22,847.31 MicroController1.37@-129.71,847.31 ; v1@1111.79,506.34 v1(1133.35,506.34)
  Bottom Layer w12: R29.1@234.88,-1998.01 234.88,-1971.79 279.25,-1927.42 v1(347.3,-1927.42) ; v1(606.91,-1780.49) v1@606.91,-1677.64 ; v1@1015.94,649.92 1015.94,602.19 v1@1111.79,506.34
  Bottom Layer w25: v1(1158.17,-1296.79) 1143.44,-1296.79 1207.97,-1361.32 v1(1207.97,-1389.63)
NetMicroController1_40: MicroController1.40 U27.din | length 4072.5
  Top Layer w10: v1(-296.18,871.85) -296.18,928.21 -289.06,935.33 -126.79,935.33 -5.37,813.92 253.96,813.92 293.35,853.31 ; v1@821.42,1231 v1(831.63,1231) ; v1(1068.01,1225.77) 1068.01,1376.67 1088.98,1397.64 1211.42,1397.64 1237.11,1371.95 1237.11,1157.11 1278.84,1115.37 1368.76,1115.37 1467.52,1016.61 1730.53,1016.61 1817.3,1103.39 1982.93,1103.39 2021.04,1141.5 2076.29,1141.5 2094.61,1123.18 2094.61,1092.71 2059.85,1057.95 2057.11,1057.95 2043.27,1044.11 2043.27,875.17 2043.62,874.82 2043.62,835.06 2043.27,834.71 2075.3,802.68 2134.43,802.68 2159.17,777.93 2159.17,543.62 U27.din@2157.48,541.93
  Top Layer w19.68: 293.35,853.31 443.72,853.31 v1@821.42,1231
  Bottom Layer w10: v1@-299.61,883.9 -260.9,922.6 -205.39,922.6 -190.36,907.57 -130.92,907.57 MicroController1.40@-129.71,906.37 ; v1(831.63,1231) 844.7,1231 867.07,1208.64 1032.7,1208.64 1049.82,1225.77 v1(1068.01,1225.77)
NetMicroController1_45: MicroController1.45 U36.7 | length 2663.4
  Top Layer w12: v1(-542.8,899.31) -436.32,899.31 -248.29,711.28 v1(-246.91,711.28) ; v1(-176.91,434.49) -109.09,434.49 2.07,323.33 2.07,268.52 v1(-45.51,220.94) ; v1(138.45,-507.32) 133.66,-507.32 127.34,-501 127.34,-492.56 137.58,-482.32 160.87,-505.61 160.87,-736.71 175.67,-751.52 194.53,-751.52 203.03,-760.02 207.17,-760.02
  Bottom Layer w12: v1@-527.91,896.99 -491.78,933.13 -491.78,999.66 -473.01,1018.43 -416.99,1018.43 -403.36,1004.79 MicroController1.45@-129.71,1004.79 ; v1(-246.91,711.28) -246.91,498.05 v1@-186.26,437.4 ; v1@-33.07,220.18 38,149.1 38,142.75 78.33,102.41 78.33,-281.8 91.52,-294.99 91.52,-343 72.99,-361.54 72.99,-440.59 v1@125.1,-492.7